# Altium PCB 8×35-antanna.PcbDoc
Units mm, origin at the board's own origin, x right, y up, seen from the top; angles counter-clockwise.
Board outline 35 x 8 mm, 2 copper layers (Top Layer, Bottom Layer), stack 0.999 mm thick; 1 components, 18 nets, 18 pads, 0 vias.
Unrouted connection lines stored in the file: 4.
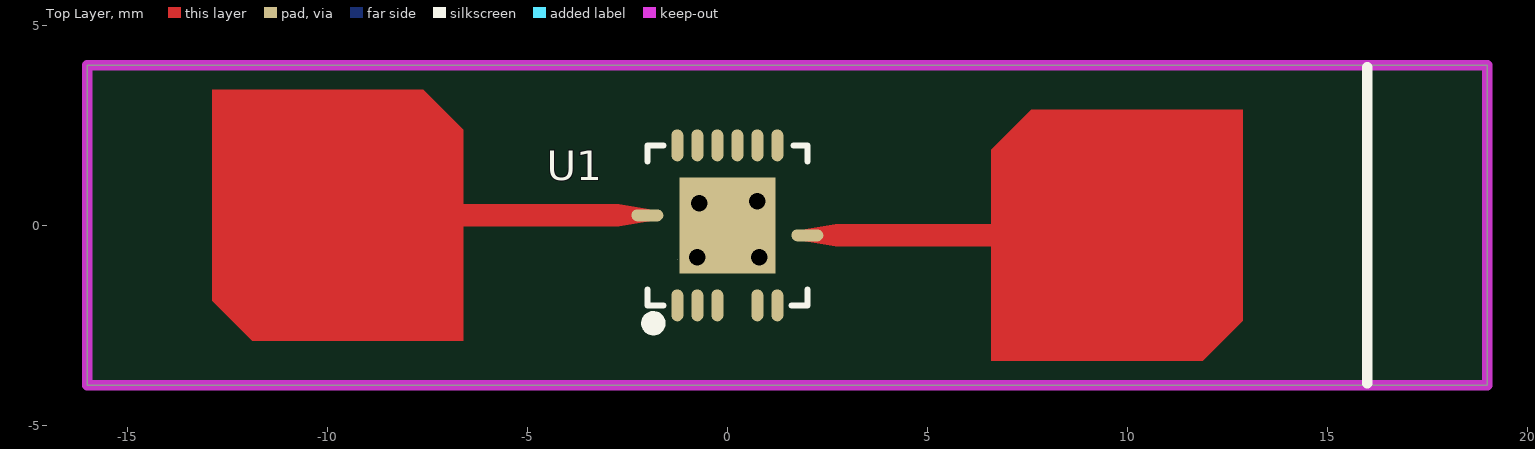
[diagram p0: Top Layer view]
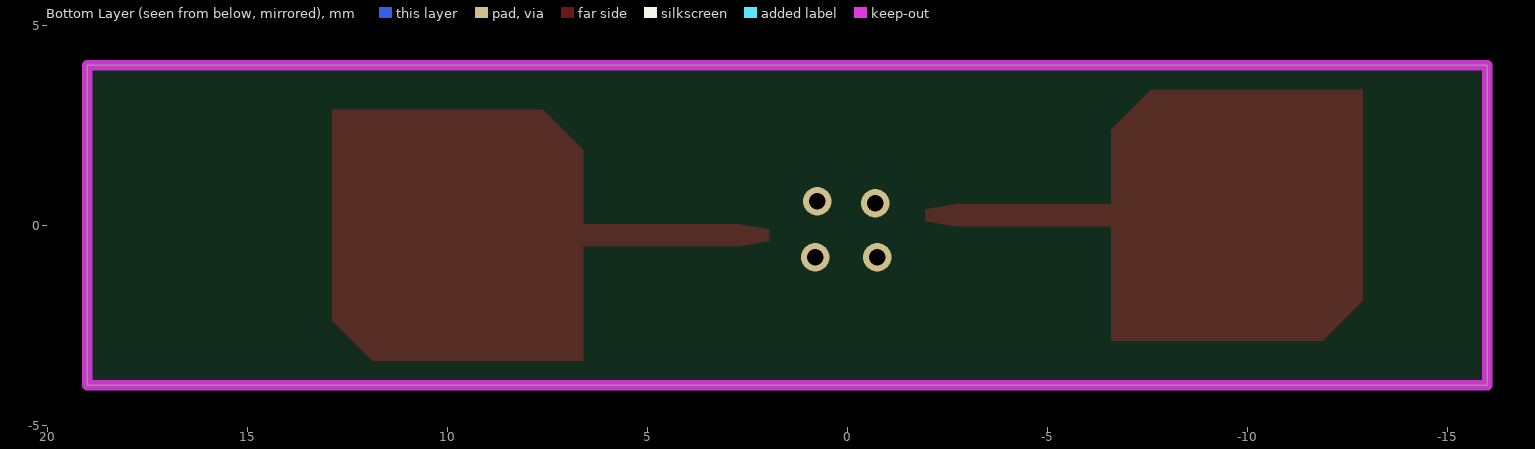
[diagram p1: Bottom Layer view, seen from below]

## Layer stack, top to bottom
Top Solder: solder mask 0.0102, Solder Resist, Dk 3.5
Top Layer: signal copper 0.0356
Dielectric1: core 0.928, FR-4, Dk 4.8
Bottom Layer: signal copper 0.0356
Bottom Solder: solder mask 0.0102, Solder Resist, Dk 3.5

## Board outline
-16,-4 -16,4 19,4 19,-4

## Design rules (kind name [scope] priority, off if disabled: settings)
Clearance [All] p1: gap=0.254 ignorepadtopadclearanceinfootprint=FALSE except(0: Arc-Hole Track-Hole SMDPad-Hole THPad-Hole Via-Hole Fill-Hole Poly-Hole Region-Hole Text-Hole)
FabricationTestpoint [(IsPad And (OnTopLayer Or OnBottomLayer))] p1: side=3 testpointundercomponent=TRUE minsize=1.016 maxsize=2.54 preferedsize=1.524 minholesize=0 maxholesize=1.016 preferedholesize=0.813 testpointgrid=0.025 allowsidetop=TRUE allowsidebottom=TRUE usegrid=TRUE gridtolerance=0
PolygonConnect [All] p1: connectstyle=Direct reliefconductorwidth=0.254 reliefentries=4 polygonreliefangle="90 Angle" airgapwidth=0.254
RoutingVias [All] p1: holewidth=0.711 width=1.27 viastyle="Through Hole" minholewidth=0.711 minwidth=1.27 maxholewidth=0.711 maxwidth=1.27
SolderMaskExpansion [All] p1: expansion=0.102
Width [All] p1: maxlimit=1.016 minlimit=0.254 preferedwidth=0.254 minimp=50.000000 maximp=50.000000 favimp=50.000000
29 further rules are at their usual default settings.

## Components (designator, comment, footprint, x,y, rotation, side; value= is the part's Value field where it differs from the comment)
U1 "XBR816" QFN24-1 0,0 r90 top

## Footprints (in the part's own frame and the unit in brackets; to place one, negate y for a bottom-side part, rotate by r counter-clockwise, add the part's x,y. Pads: shape width x height; smd on the part's side, far side on the other; paste and mask are expansions set on the pad)
QFN24-1 [mm] "QFN24"
  oval 0.8x0.3 smd: 1(-2,1.25) 2(-2,0.75) 3(-2,0.25) 5(-2,-0.75) 6(-2,-1.25) 13(2,-1.25) 14(2,-0.75) 15(2,-0.25) 16(2,0.25) 17(2,0.75) 18(2,1.25)
  oval 0.3x0.8 smd: 9(-0.25,-2) 21(0.25,2)
  rect 2.4x2.4 smd: 25(0,0)
  silkscreen extent -2.6,-2 2,2, body extent -2,-2 2,2, height 1

## Part data
U1: library part XBR1000_24_1

## Free pads (board coordinates)
  round 0.711 hole 0.406: 1(-0.75,-0.8) 1(-0.7,0.55) 1(0.75,0.6) 1(0.8,-0.8)

## Nets (pads, with @x,y where several pads share a name; then routed paths per layer and width w, separated by ;. In a path a pad name is that pad's centre, name@x,y a point inside that pad or via, vN(x,y) a via of type N, cw(c..) or ccw(c..) an arc to the next point about the centre after c; other vN are vias at no path point)
1.2V: U1.13 U1.15 U1.16 U1.17 U1.18
2~5V: 
AD: U1.6
GND: pad.1 U1.25
IF: 
NetC1_1: 
NetC3_1: 
NetC4_2: U1.5
NetC15_2: 
NetC16_1: 
NetC16_2: 
NetC17_1: U1.2
NetC17_2: U1.1
NetR10_1: U1.3
NetR14_1: 
NetR17_2: 
RX: U1.21
TX: 
pads on no net: U1.9 U1.14

## Keep-outs
Keep-Out Layer:
  the board outline again, w0.254

## Other copper
Top Layer:
  region: 11.88,-3.39 6.6,-3.39 6.6,-0.525 2.7,-0.525 1.95,-0.4 1.95,-0.1 2.7,0.025 6.6,0.025 6.6,1.89 7.6,2.89 12.88,2.89 12.88,-2.39
  region net RX: -6.6,-2.89 -6.6,-0.025 -2.7,-0.025 -1.95,0.1 -1.95,0.4 -2.7,0.525 -6.6,0.525 -6.6,2.39 -7.6,3.39 -12.88,3.39 -12.88,-1.89 -11.88,-2.89

## Silkscreen, mask and mechanical layers (free items; w line width, h text height)
Top Overlay:
  lines w0.254: 16,-3.95 16,3.95